# Altium PCB mini_system.PcbDoc
Units mil, origin at the board's own origin, x right, y up, seen from the top; angles counter-clockwise.
Board outline 2100 x 900 mil, 2 copper layers (Top Layer, Bottom Layer); 33 components, 50 nets, 179 pads, 47 vias.
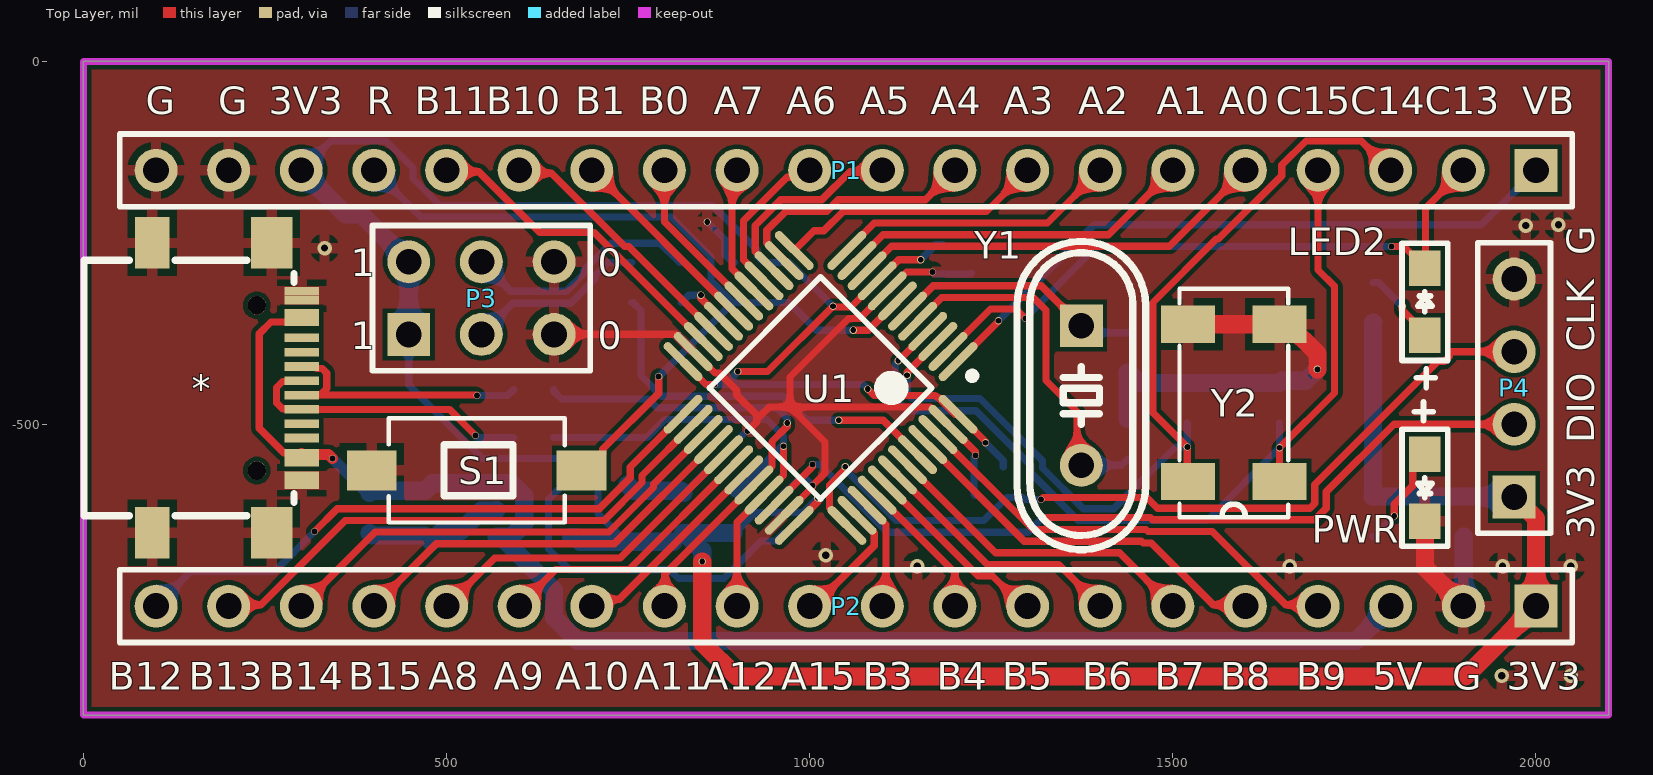
[diagram p0: Top Layer view]
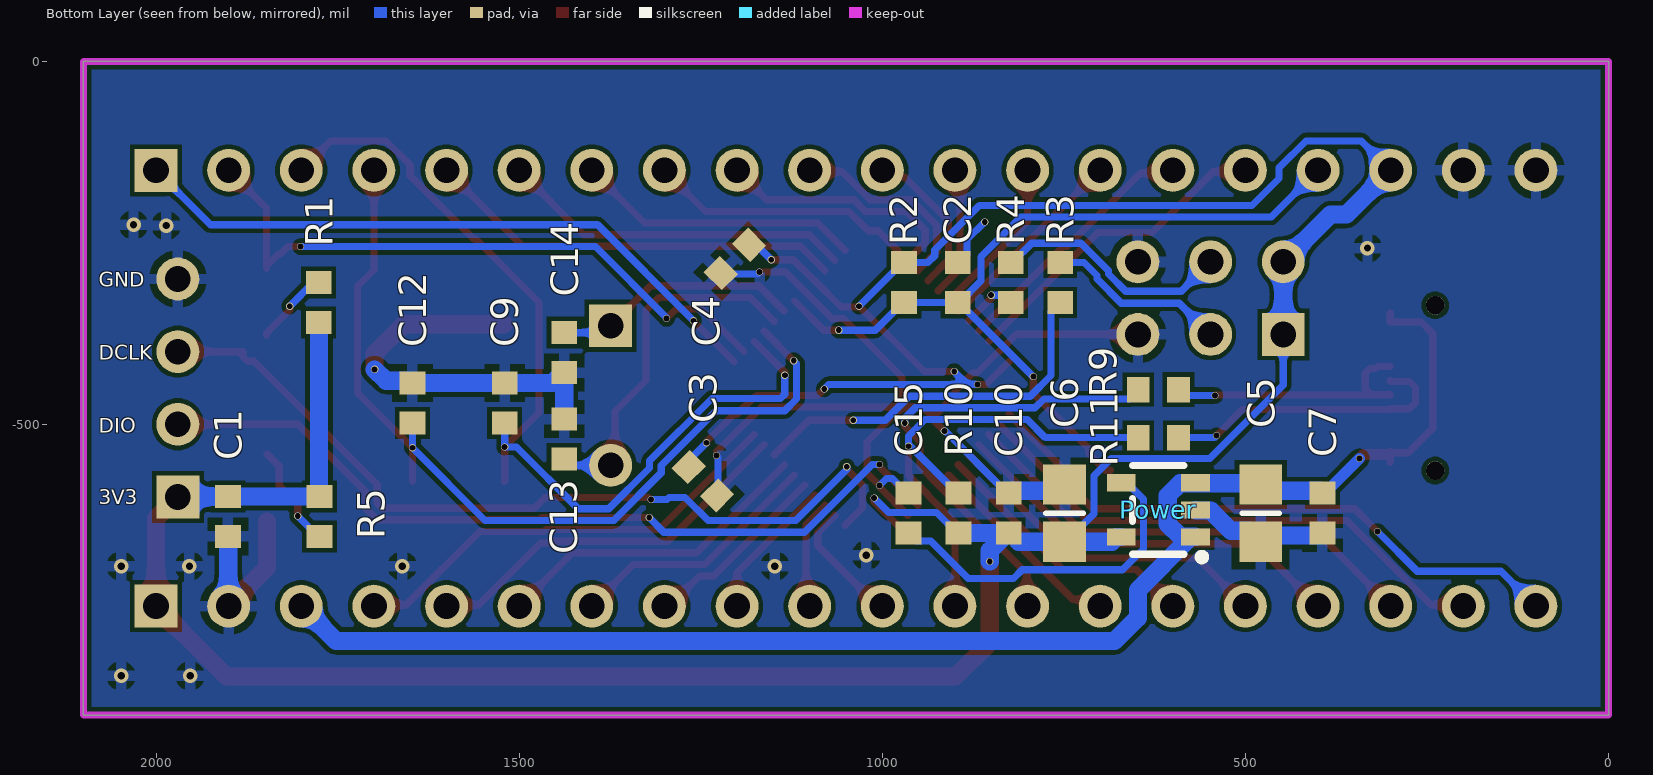
[diagram p1: Bottom Layer view, seen from below]

## Layer stack, top to bottom
Top Solder: solder mask 0.4, Solder Resist, Dk 3.5
Top Layer: signal copper 1.4
Dielectric 1: dielectric 12.6, FR-4, Dk 4.8
Bottom Layer: signal copper 1.4
Bottom Solder: solder mask 0.4, Solder Resist, Dk 3.5

## Board outline
0,-900 2100,-900 2100,0 0,0

## Design rules (kind name [scope] priority, off if disabled: settings)
Clearance [All] p1: gap=6 ignorepadtopadclearanceinfootprint=FALSE
HoleSize [All] p1: absolutevalues=TRUE maxlimit=100 minlimit=4 maxpercent=80.000 minpercent=20.000
HoleToHoleClearance [All] p1: gap=8 allowstackedmicrovias=TRUE
MinimumSolderMaskSliver [All] p1: minsoldermaskwidth=6
PlaneConnect [All] p1: planeconnectstyle=Relief reliefexpansion=20 reliefentries=4 reliefconductorwidth=15 reliefairgap=10
PolygonConnect [All] p1: connectstyle=Relief reliefconductorwidth=15 reliefentries=4 polygonreliefangle="90 Angle" airgapwidth=10
RoutingVias [All] p1: holewidth=10 width=20 viastyle="Through Hole" minholewidth=6 minwidth=12 maxholewidth=16 maxwidth=32
SilkToSilkClearance [All] p1: silktosilkclearance=1
SilkToSolderMaskClearance [IsPad] p1: minsilkscreentomaskgap=0 clearancetoexposedcopper=TRUE
SolderMaskExpansion [All] p1: expansion=4 istentingtop=TRUE
UnRoutedNet [All] p1: checkbadconnections=TRUE
Width Width_GND [InNet('GND')] p1: maxlimit=80 minlimit=10 preferedwidth=25 minimp=50.000000 maximp=50.000000 favimp=50.000000
Width Width_5V [InNet('+5')] p2: maxlimit=80 minlimit=10 preferedwidth=25 minimp=50.000000 maximp=50.000000 favimp=50.000000
Width Width_3V3 [InNet('3V3')] p3: maxlimit=80 minlimit=10 preferedwidth=25 minimp=50.000000 maximp=50.000000 favimp=50.000000
Width [All] p4: maxlimit=40 minlimit=8 preferedwidth=10 minimp=50.000000 maximp=50.000000 favimp=50.000000
23 further rules are at their usual default settings.

## Components (designator, comment, footprint, x,y, rotation, side; value= is the part's Value field where it differs from the comment)
* "USB-C 16P" "USB-C 16P" 95,-250 r270 top
C1 "104" 1608[0603] 1901,-626.44 r90 bottom value=100pF
C2 "104" 1608[0603] 896,-304.56 r270 bottom value=100pF
C3 "104" 1608[0603] 1247,-578 r45 bottom value=100pF
C4 "104" 1608[0603] 1203,-272 r135 bottom value=100pF
C5 "105" 6-0805_M 479,-622 r90 bottom value=100pF
C6 "105" 6-0805_M 749,-622 r270 bottom value=100pF
C7 "104" 1608[0603] 394,-622 r90 bottom value=100pF
C9 "Cap" 1608[0603] 1520,-470.44 r90 bottom value=100pF
C10 "104" 1608[0603] 826,-622 r270 bottom value=100pF
C12 "Cap" 1608[0603] 1647,-470.44 r270 bottom value=100pF
C13 "Cap" 1608[0603] 1438,-520 r90 bottom value=100pF
C14 "Cap" 1608[0603] 1438,-401 r90 bottom value=100pF
C15 "223" 1608[0603] 964,-622 r90 bottom value=100pF
LED2 "LED" LED 1847,-331 r270 top
P1 "Header 20" HDR1X20 2000,-150 r180 top locked
P2 "Header 20" HDR1X20 2000,-750 r180 top locked
P3 "Header 3X2" HDR2X3 448,-376 r0 top
P4 "Header 4" HDR1X4 1970,-599.61 r90 top
Power "ME6211" ME6211 620,-617.51 r180 bottom
PWR "LED" LED 1847,-587 r90 top
R1 "Res" 1608[0603] 1776,-332 r90 bottom
R2 "Res" 1608[0603] 970,-304.56 r90 bottom
R3 "104" 1608[0603] 755,-304.56 r90 bottom
R4 "104" 1608[0603] 823,-304.56 r270 bottom
R5 "Res" 1608[0603] 1775,-626.44 r270 bottom
R9 "22R" 1608[0603] 620,-452 r0 bottom
R10 "10K" 1608[0603] 895,-622 r90 bottom
R11 "22R" 1608[0603] 620,-518 r0 bottom
S1 "Button" BUTTON 397,-563 r0 top
U1 "STM32F103C8T6" STM-LQFP48_N 1015,-449.61 r225 top locked
Y1 "8M" XTAL3 1374,-364 r270 top
Y2 "XTAL_32.768" MC-306 1583.99,-470.27 r90 top

## Footprints (in the part's own frame and the unit in brackets; to place one, negate y for a bottom-side part, rotate by r counter-clockwise, add the part's x,y. Pads: shape width x height; smd on the part's side, far side on the other; paste and mask are expansions set on the pad)
6-0805_M [mm] "Chip Resistor, Body 2.0x1.2mm, IPC Low Density"
  rect 1.4x1.5 smd: 1(-1,0) 2(1,0)
  silkscreen extent 0,-0.65 0,0.65, body extent -1.07,-0.7 1.07,0.7, height 0.7
1608[0603] [mm] "Chip Capacitor, Body 1.6x0.8mm, IPC High Density"
  rect 0.8x0.9 smd: 1(-0.7,0) 2(0.7,0)
  body extent -0.87,-0.48 0.87,0.48, height 1.3
BUTTON [mm]
  rect 1.74x1.4 smd: 1(0,0) 2(7.34,0)
  silkscreen extent 0.59,-1.83 6.75,1.83
HDR1X4 [mm] "Connector; Header; 4 Position"
  rect 1.5x1.5 hole 0.9: 1(0,0)
  round 1.5 hole 0.9: 2(2.54,0) 3(5.08,0) 4(7.62,0)
  silkscreen extent -1.27,-1.27 8.89,1.27
HDR1X20 [mm] "Connector; Header; 20 Position"
  rect 1.5x1.5 hole 0.9: 1(0,0)
  round 1.5 hole 0.9: 2(2.54,0) 3(5.08,0) 4(7.62,0) 5(10.16,0) 6(12.7,0) 7(15.24,0) 8(17.78,0) 9(20.32,0) 10(22.86,0) 11(25.4,0) 12(27.94,0) 13(30.48,0) 14(33.02,0) 15(35.56,0) 16(38.1,0) 17(40.64,0) 18(43.18,0) 19(45.72,0) 20(48.26,0)
  silkscreen extent -1.27,-1.27 49.53,1.27
HDR2X3 [mm] "Connector; Header; 3x2 Position"
  rect 1.5x1.5 hole 0.9: 1(0,0)
  round 1.5 hole 0.9: 2(0,2.54) 3(2.54,0) 4(2.54,2.54) 5(5.08,0) 6(5.08,2.54)
  silkscreen extent -1.27,-1.27 6.35,3.81
LED [mil]
  rect 49x43 smd: 1(46.26,0) 2(-46.26,0)
  silkscreen extent -81,-31 118,31
MC-306 [mm]
  rect 1.3x1.9 smd: 1(-2.75,-1.6) 2(2.75,-1.6) 3(2.75,1.6) 4(-2.75,1.6)
  silkscreen extent -4,-1.9 4,1.9
ME6211 [mm] "SOT23-5"
  rect 1x0.6 smd: 1(1.3,-0.95) 2(1.3,0) 3(1.3,0.95) 4(-1.3,0.95) 5(-1.3,-0.95)
  silkscreen extent -0.9,-1.78 1.65,1.55
STM-LQFP48_N [mm] "QFP, 48-Leads, Body 7x7mm, Pitch 0.5mm, IPC Medium Density"
  oval 1.8x0.3 smd: 1(-4.05,2.75) 2(-4.05,2.25) 3(-4.05,1.75) 4(-4.05,1.25) 5(-4.05,0.75) 6(-4.05,0.25) 7(-4.05,-0.25) 8(-4.05,-0.75) 9(-4.05,-1.25) 10(-4.05,-1.75) 11(-4.05,-2.25) 12(-4.05,-2.75) 25(4.05,-2.75) 26(4.05,-2.25) 27(4.05,-1.75) 28(4.05,-1.25) 29(4.05,-0.75) 30(4.05,-0.25) 31(4.05,0.25) 32(4.05,0.75) 33(4.05,1.25) 34(4.05,1.75) 35(4.05,2.25) 36(4.05,2.75)
  oval 0.3x1.8 smd: 13(-2.75,-4.05) 14(-2.25,-4.05) 15(-1.75,-4.05) 16(-1.25,-4.05) 17(-0.75,-4.05) 18(-0.25,-4.05) 19(0.25,-4.05) 20(0.75,-4.05) 21(1.25,-4.05) 22(1.75,-4.05) 23(2.25,-4.05) 24(2.75,-4.05) 37(2.75,4.05) 38(2.25,4.05) 39(1.75,4.05) 40(1.25,4.05) 41(0.75,4.05) 42(0.25,4.05) 43(-0.25,4.05) 44(-0.75,4.05) 45(-1.25,4.05) 46(-1.75,4.05) 47(-2.25,4.05) 48(-2.75,4.05)
  silkscreen extent -4.17,-2.75 2.75,3.57, body extent -3.5,-3.5 3.5,3.5, height 1.6
"USB-C 16P" [mm]
  rect 1.8x1.45 smd: 0(0,4.18) 0(10.14,4.18)
  rect 1.8x1.2 smd: 0(0,0) 0(10.14,0)
  rect 0.3x1.2 smd: A1(1.999,5.22) A4(2.761,5.22) A5(3.82,5.22) A6(4.82,5.22) A7(5.32,5.22) A8(6.32,5.22) A9(7.361,5.22) A12(8.149,5.22) B1(8.454,5.22) B4(7.666,5.22) B5(6.82,5.22) B6(5.82,5.22) B7(4.32,5.22) B8(3.32,5.22) B9(2.456,5.22) B12(1.694,5.22)
  round 0.65 hole 0.65 unplated: ""(2.18,3.65) ""(7.96,3.65)
  silkscreen extent 0.6,-2.39 9.54,4.95
XTAL3 [mm]
  rect 1.5x1.5 hole 0.9: 1(0,0)
  round 1.5 hole 0.9: 2(4.88,0)
  silkscreen extent -2.95,-2.25 7.83,2.25

## Part data
C1 C2 C3 C4 C5 C6 C7 C10 C15: library part Cap, "Capacitor", LatestRevisionDate=17-Jul-2002, LatestRevisionNote="Re-released for DXP Platform.", PackageDescription="Radial Cap, Thru-Hole; 2 Leads; 0.3 in Pin Spacing", PackageReference=RAD-0.3, Published=8-Jun-2000, Publisher="Altium Limited"
C9 C12 C13 C14: "Capacitor", LatestRevisionDate=17-Jul-2002, LatestRevisionNote="Re-released for DXP Platform.", PackageDescription="Radial Cap, Thru-Hole; 2 Leads; 0.3 in Pin Spacing", PackageReference=RAD-0.3, Published=8-Jun-2000, Publisher="Altium Limited"
LED2 PWR: "Typical INFRARED GaAs LED", LatestRevisionDate=08-Jul-2005, LatestRevisionNote="Mech Layer 1 removed.", PackageDescription="LED; 2 Leads", PackageReference=LED-0, Published=8-Jun-2000, Publisher="Altium Limited"
P1 P2: "Header, 20-Pin", LatestRevisionDate=17-Jul-2002, LatestRevisionNote="Re-released for DXP Platform.", Publisher="Altium Limited"
P3: "Header, 3-Pin, Dual row", LatestRevisionDate=17-Jul-2002, LatestRevisionNote="Re-released for DXP Platform.", Publisher="Altium Limited"
P4: "Header, 4-Pin", LatestRevisionDate=17-Jul-2002, LatestRevisionNote="Re-released for DXP Platform.", Publisher="Altium Limited"
Power: "SOT23-5"
R1 R2 R5: "Resistor", LatestRevisionDate=17-Jul-2002, LatestRevisionNote="Re-released for DXP Platform.", PackageDescription="Axial Device, Thru-Hole; 2 Leads; 0.4 in Pin Spacing", PackageReference=AXIAL-0.4, Published=8-Jun-2000, Publisher="Altium Limited"
R3 R4 R9 R10 R11: library part Res, "Resistor", LatestRevisionDate=17-Jul-2002, LatestRevisionNote="Re-released for DXP Platform.", PackageDescription="Axial Device, Thru-Hole; 2 Leads; 0.4 in Pin Spacing", PackageReference=AXIAL-0.4, Published=8-Jun-2000, Publisher="Altium Limited"
S1: "Switch", LatestRevisionDate=17-Jul-2002, LatestRevisionNote="Re-released for DXP Platform.", PackageDescription="Switch; 2 Leads", PackageReference=SPST-2, Published=24-Mar-1999, Publisher="Altium Limited"
U1: "ARM Cortex-M3 32-bit MCU, 64 KB Flash, 20 KB Internal RAM, 37 I/Os, 48-pin LQFP, -40 to 85 degC, Tray", I/Os (High Current)=37, Operating Frequency(F) (Processor speed) (MHz)=72, Supplier Part Number 1=497-6063-ND, Supply Voltage(Vcc) min (V)=2, A/D Converter="2x12-bit (10 Channel)", ComponentLink1Description="Manufacturer URL", ComponentLink1URL=http://www.st.com/web/en/home.html, ComponentLink2Description=Datasheet, ComponentLink2URL=http://www.st.com/st-web-ui/static/active/en/resource/technical/document/datasheet/CD00161566.pdf, ComponentLink3Description="Package Specification", ComponentLink3URL=http://www.st.com/st-web-ui/static/active/en/resource/technical/document/datasheet/DM00058181.pdf, Core="ARM Cortex-M3", DatasheetVersion="Rev. 16", FLASH Size (Prog) (kB)=64, Internal RAM Size (kB)=20, Mounting Technology="Surface Mount", PackageDescription="48-Pin Low Profile Quad Flat Package, 7 x 7 mm Body, 0.5 mm Pitch", PackageReference=LQFP48, PackageVersion="Rev. 6, 06/2013", Packing=Tray, PartNumber=STM32F103C8T6, Supplier 1=Digi-Key, Supplier 2=Farnell, Supplier 3=Newark, Supplier 4=Newark, Supplier 5=Mouser, Supplier Part Number 2=1447637, Supplier Part Number 3=59M2182, Supplier Part Number 4=57P1222, Supplier Part Number 5=511-STM32F103C8T6
Y1: library part XTAL, "Crystal Oscillator", LatestRevisionDate=17-Jul-2002, LatestRevisionNote="Re-released for DXP Platform.", PackageDescription="Crystal, Thru-Hole; 2 Leads; Body 3.1 x 8.2 mm (Dia.xH)", PackageReference=R38, Published=8-Jun-2000, Publisher="Altium Limited"
Y2: "32.768kHz", LatestRevisionDate=17-Jul-2002, LatestRevisionNote="Re-released for DXP Platform.", PackageDescription="Crystal, Thru-Hole; 2 Leads; Body 3.1 x 8.2 mm (Dia.xH)", PackageReference=R38, Published=8-Jun-2000, Publisher="Altium Limited"

## Via types
v1: diameter 10, hole 8, Top Layer to Bottom Layer, tented both sides, 37 vias
v2: diameter 20, hole 10, Top Layer to Bottom Layer, tented both sides, 10 vias

## Nets (pads, with @x,y where several pads share a name; then routed paths per layer and width w, separated by ;. In a path a pad name is that pad's centre, name@x,y a point inside that pad or via, vN(x,y) a via of type N, cw(c..) or ccw(c..) an arc to the next point about the centre after c; other vN are vias at no path point)
3V3: C1.2 C3.2 C4.2 C6.2 C10.2 P1.18 P2.1 P3.1 P3.2 P4.1 Power.5 R1.1 R2.2 R5.1 R10.1 U1.9 U1.24 U1.36 U1.48 | length 4899.2
  Top Layer w10: U1.24 857.28,-445 v1(869,-445) ; v1(901,-427) 942,-427 v1(1032,-337) 1033.01,-338.01 1057,-338.01 U1.9 1093.44,-302.06 1122.5,-273 v1(1153,-273) ; U1.36 1011.25,-606.47 v1(1011.25,-601.25) ; v1(1080,-451) 1088.85,-459.85 1172.66,-459.85 1174.74,-461.93 1176.51,-461.93 1200.37,-485.8 U1.48 1242,-523.49 v1(1242,-525)
  Top Layer w25: v1@851.97,-693.03 851.97,-799.97 899,-847 1903,-847 P2.1 2000,-629.61 P4.1 ; v1@852,-693 v1(852,-688.5)
  Bottom Layer w10: P1.18 340.53,-109.47 416.79,-109.47 453.9,-146.58 453.9,-161.21 491.01,-198.32 866.34,-198.32 927.78,-259.76 927.78,-267.49 937.28,-277 R2.2 971.97,-277 v1(1032,-337) ; P3.1 448,-445.63 549.09,-546.72 684.84,-546.72 708.47,-570.35 708.47,-622.81 747.03,-661.37 C6.2 ; v1(869,-445) 883,-445 ; R10.1 896.97,-649.56 925.34,-621.19 991.32,-621.19 v1(1011.25,-601.25) ; v1(901,-427) 883,-445 ; v1(1080,-451) 1074,-445 883,-445 ; v1(1153,-273) 1173.49,-252.51 C4.2 ; v1(1242,-525) 1266.49,-549.49 C3.2
  Bottom Layer w25: P1.18 360.7,-210.7 382.7,-210.7 P3.2 P3.1 ; Power.5 677.68,-654.91 684.14,-661.37 C6.2@747.03,-661.37 ; C6.2 C10.2@812.22,-661.37 ; C10.2 C10.2@827.97,-649.56 ; v1(852,-688.5) 852,-673.59 C10.2@827.97,-649.56 ; R10.1 C10.2@827.97,-649.56 ; R1.1 1775.5,-360.06 1775.5,-598.38 R5.1 C1.2 1901.36,-599.24 1969.64,-599.24 P4.1
+5: *.A4 *.A9 *.B4 *.B9 C5.2 C7.2 P2.3 Power.1 Power.3 | length 2051.5
  Top Layer w10: *.B4 *.A9 299.61,-538.91 275.84,-538.91 242,-505.08 242,-375.01 258.3,-358.71 *.A4 *.B9
  Top Layer w15: *.A9 302.11,-541.41 337.61,-541.41 v1(342.89,-546.69)
  Bottom Layer w15: v1(342.89,-546.69) 390.64,-594.44 C7.2
  Bottom Layer w25: C7.2 397.25,-591.19 470.44,-591.19 C5.2 480.83,-580.8 589.77,-580.8 607,-598.04 607,-636.99 589.77,-654.22 569.51,-654.22 Power.1 575.32,-654.91 648.03,-727.62 648.03,-765.95 680.11,-798.03 1751.97,-798.03 P2.3
BOOT0: R3.1 U1.44 | length 532.8
  Top Layer w10: v1(1040,-494) 1101.15,-494 U1.44
  Bottom Layer w10: R3.1 756.97,-332.12 767.72,-342.87 767.72,-432.34 796.37,-461 962.88,-461 995.88,-494 v1(1040,-494)
BOOT1: R4.2 U1.20 | length 80.3
  Top Layer w10: v1(850.18,-321.82) 850.18,-326.05 881.37,-357.25 U1.20
  Bottom Layer w10: R4.2 833.3,-321.82 v1(850.18,-321.82)
D+: *.A6 *.B6 R11.1 | length 405.8
  Top Layer w10: *.A6 299.61,-440.67 274.21,-440.67 265.89,-448.99 265.89,-469.91 274.21,-478.23 299.61,-478.23 *.B6 504.13,-479.13 v1(540,-515)
  Bottom Layer w10: v1(540,-515) 543,-518 R11.1
D-: *.A7 *.B7 R9.1 | length 393.3
  Top Layer w10: *.B7 318.23,-420.08 321.01,-422.86 328.69,-422.86 335.13,-429.3 335.13,-450.23 326.82,-458.54 301.42,-458.54 *.A7 541.45,-459.45 v1(542,-460)
  Bottom Layer w10: v1(542,-460) 584.44,-460 R9.1
GND: *.0 *.A1 *.A12 *.B1 *.B12 C1.1 C2.1 C3.1 C4.1 C5.1 C6.1 C7.1 C9.2 C10.1 C12.1 C13.2 C14.1 C15.2 P1.19 P1.20 P2.2 P3.5 P3.6 P4.4 Power.2 PWR.2 S1.1 U1.8 U1.23 U1.35 U1.47 Y2.2 Y2.3 | length 2610.9
  Top Layer w10: P3.5 648.37,-375.63 815.26,-375.63 839.13,-399.5 U1.23 840.11,-399.5 869.61,-429 875.63,-429 899.69,-453.06 899.69,-459.57 927,-486.88 927,-496.55 v1(914.55,-509) ; 930.06,-489.94 944.15,-475.85 972.85,-475.85 ; U1.35 1004,-585.88 v1(1004,-584) 1021,-567 1021,-524 972.85,-475.85 ; v1(1169,-290) 1133.34,-290 1107.36,-315.98 U1.8 1068.84,-354.01 1053.37,-354.01 972.85,-434.53 972.85,-475.85 ; v1(1228.23,-542.77) 1228.23,-537.56 U1.47 1189.89,-499.72 1166.03,-475.85 972.85,-475.85
  Top Layer w25: Y2.3 Y2.2 1658.8,-362 1699,-402.2 v1(1699,-424) ; PWR.2 1847,-697 P2.2
  Bottom Layer w10: C10.1 827.97,-594.44 913.41,-509 v1(914.55,-509) ; v1(859,-221) 883.28,-245.28 883.28,-266.25 894.03,-277 C2.1 ; C15.2 965.97,-594.44 986.06,-574.35 994.35,-574.35 v1(1004,-584) ; v1(1169,-290) 1171.88,-292.88 1221.1,-292.88 C4.1 ; C3.1 1226.12,-596.1 1226.12,-544.88 v1(1228.23,-542.77)
  Bottom Layer w25: C7.1 397.25,-652.81 470.44,-652.81 C5.1 494.06,-646.31 519.76,-646.31 547.87,-618.2 568.13,-618.2 Power.2 ; C6.1 757.56,-591.19 822.75,-591.19 C10.1 ; C13.2 C14.1 1439.97,-428.56 1454.29,-442.88 C9.2 C12.1 1650.25,-439.63 1683.37,-439.63 v1(1699,-424) ; P2.2 1900.5,-749.5 1900.5,-654.5 C1.1
  other v2: 1953,-846 2048,-846 1148,-695 1661,-695 1954,-695 2048,-695 1022,-680 332,-257 1986,-226 2031,-225
NetC15_1: C15.1 Power.4 | length 474.7
  Bottom Layer w10: Power.4 663.31,-580.11 640.5,-602.91 640.5,-671.27 669.15,-699.93 807.24,-699.93 819.31,-712 881.58,-712 933.27,-660.31 953.25,-660.31 C15.1
NetLED2_1: LED2.1 R1.2 | length 107
  Top Layer w10: v1(1816,-337) 1816,-342.26 1848,-374.26 LED2.1@1848,-377.26
  Bottom Layer w10: R1.2 1783.44,-304.44 v1(1816,-337)
NetP3_3: P3.3 R3.2 | length 250.7
  Bottom Layer w10: P3.3 590.99,-333.01 670.93,-333.01 704.53,-299.41 704.53,-294.76 722.28,-277 R3.2
NetP3_4: P3.4 R4.1 | length 333
  Bottom Layer w10: P3.4 588.53,-316.53 664.79,-316.53 688.53,-292.79 688.53,-288.13 726.4,-250.25 794.28,-250.25 821.03,-277 R4.1
NetPWR_1: PWR.1 R5.2 | length 144.2
  Top Layer w10: v1(1804.97,-626) 1804.97,-609.9 1830.5,-584.37 1830.5,-557.24 PWR.1
  Bottom Layer w10: R5.2 1776.97,-654 v1(1804.97,-626)
NRST: C2.2 P1.17 R2.1 S1.2 U1.7 | length 1169
  Top Layer w10: S1.2 692.67,-563 715.23,-540.44 715.23,-533.75 792,-456.98 v1(792,-434) ; v1(1060,-370.01) 1080.68,-370.01 U1.7
  Bottom Layer w10: P1.17 464.32,-214.32 809.34,-214.32 864.28,-269.26 864.28,-302.36 C2.2@894.03,-332.12 ; v1(792,-434) 792.15,-434 C2.2@894.03,-332.12 ; v1(1060,-370.01) 1009.86,-370.01 971.97,-332.12 R2.1 C2.2@894.03,-332.12
OSC_IN: C13.1 U1.5 Y1.2 | length 498.7
  Top Layer w10: U1.5 1149.12,-357.74 1181.85,-325 1307.63,-325 1325.33,-342.7 1325.33,-439.33 1368.15,-482.15 1368.15,-550.28 Y1.2
  Bottom Layer w10: Y1.2 1429.43,-556.13 C13.1
OSC_OUT: C14.2 U1.6 Y1.1 | length 344.4
  Top Layer w10: U1.6 1135.2,-343.82 1170.02,-309 1319,-309 Y1.1
  Bottom Layer w10: Y1.1 1383.44,-373.44 C14.2
PA0: P1.5 U1.10 | length 578.2
  Top Layer w10: U1.10 1112.64,-254.53 1495.47,-254.53 P1.5
PA1: P1.6 U1.11 | length 486.3
  Top Layer w10: U1.11 1100.8,-238.53 1411.47,-238.53 P1.6
PA2: P1.7 U1.12 | length 394.5
  Top Layer w10: U1.12 1088.97,-222.53 1327.47,-222.53 P1.7
PA3: P1.8 U1.13 | length 366.9
  Top Layer w10: U1.13 979.4,-259.71 1005.99,-233.12 1019.45,-233.12 1046.04,-206.53 1243.47,-206.53 P1.8
PA4: P1.9 U1.14 | length 344.8
  Top Layer w10: U1.14 964.89,-273.73 941.02,-249.87 941.02,-232.42 966.92,-206.53 1023.41,-206.53 1039.41,-190.53 1159.47,-190.53 P1.9
PA5: P1.10 U1.15 | length 279.5
  Top Layer w10: U1.15 950.97,-287.65 925.02,-261.7 925.02,-225.79 960.29,-190.53 1016.79,-190.53 1055.47,-151.84 1098.16,-151.84 P1.10
PA6: P1.11 U1.16 | length 214.1
  Top Layer w10: U1.16 937.05,-301.57 909.02,-273.54 909.02,-219.17 968.8,-159.39 990.61,-159.39 P1.11
PA7: P1.12 U1.17 | length 181.3
  Top Layer w10: P1.12 893.02,-156.98 893.02,-285.38 923.13,-315.49 U1.17
PA8: P2.16 U1.29 | length 467.7
  Top Layer w10: P2.16 566.38,-683.62 739.23,-683.62 U1.29
PA9: P2.15 U1.30 | length 375.9
  Top Layer w10: P2.15 650.38,-699.62 751.07,-699.62 U1.30
PA10: P2.14 U1.31 | length 284.1
  Top Layer w10: P2.14 709.39,-740.61 737.91,-740.61 U1.31
PA11: P2.13 R9.2 U1.32 | length 667.5
  Top Layer w10: P2.13 800.89,-749.11 800.89,-705.47 U1.32 923.13,-582.74 948,-557.87 948,-523.37 969,-502.37 v1(969,-498)
  Bottom Layer w10: R9.2 647.56,-453.97 658.31,-464.72 777.46,-464.72 789.75,-477 954.64,-477 969,-491.36 v1(969,-498)
PA12: P2.12 R10.2 R11.2 U1.33 | length 692.7
  Top Layer w10: P2.12 900,-634.69 937.05,-597.64 937.05,-596.66 964,-569.71 v1(964,-530)
  Bottom Layer w10: R11.2 775.47,-518 800.47,-493 941.37,-493 964,-515.63 v1(964,-530) 961.41,-530 896.97,-594.44 R10.2
PA15: P2.11 U1.38 | length 175.1
  Top Layer w10: P2.11 1005.77,-750 1088.98,-666.79 1088.98,-649.35 1065.11,-625.48 U1.38
PB0: P1.13 U1.18 | length 225.1
  Top Layer w10: P1.13 800,-220.69 U1.18
PB1: P1.14 U1.19 | length 275.6
  Top Layer w10: P1.14 700.98,-150 894.8,-343.82 U1.19
PB3: P2.10 U1.39 | length 151.7
  Top Layer w10: U1.39 1079.03,-611.56 1104.98,-637.51 1104.98,-745.02 P2.10
PB4: P2.9 U1.40 | length 197.2
  Top Layer w10: U1.40 1200,-704.2 P2.9
PB5: P2.8 U1.41 | length 262.2
  Top Layer w10: U1.41 1232.18,-708.54 1251.8,-708.54 1293.26,-750 P2.8
PB6: P2.7 U1.42 | length 354.1
  Top Layer w10: U1.42 1244.02,-692.54 1342.54,-692.54 P2.7
PB7: P2.6 U1.43 | length 445.9
  Top Layer w10: U1.43 1255.86,-676.54 1426.54,-676.54 P2.6
PB8: P2.5 U1.45 | length 529.6
  Top Layer w10: U1.45 1295.53,-660.54 1456.58,-660.54 1459.16,-663.13 1470.44,-663.13 1555.47,-748.16 1598.16,-748.16 P2.5
PB9: P2.4 U1.46 | length 621.4
  Top Layer w10: U1.46 1300.57,-637.74 1307.37,-644.54 1463.2,-644.54 1465.79,-647.13 1483.87,-647.13 1554.44,-647.13 1655.47,-748.16 1698.16,-748.16 P2.4
PB10: P1.15 U1.21 | length 359.3
  Top Layer w10: P1.15 603.94,-153.94 644.53,-153.94 745.49,-254.91 750.71,-254.91 U1.21
PB11: P1.16 U1.22 | length 451.1
  Top Layer w10: P1.16 501.84,-151.84 544.53,-151.84 628.16,-235.47 703.43,-235.47 U1.22
PB12: P2.20 U1.25 | length 843.8
  Top Layer w10: v1(318.17,-647.35) 349.52,-616 710.34,-616 753.05,-573.29 753.05,-558.44 U1.25
  Bottom Layer w10: P2.20 148,-702 263.52,-702 v1(318.17,-647.35)
PB13: P2.19 U1.26 | length 748.9
  Top Layer w10: P2.19 201.84,-748.16 244.53,-748.16 360.69,-632 716.97,-632 769.05,-579.92 769.05,-570.28 U1.26
PB14: P2.18 U1.27 | length 654
  Top Layer w10: P2.18 402,-648 723.6,-648 785.05,-586.55 785.05,-582.12 U1.27
PB15: P2.17 U1.28 | length 559.6
  Top Layer w10: P2.17 486,-664 731.01,-664 U1.28
PC13: LED2.2 P1.2 U1.2 | length 896.2
  Top Layer w10: U1.2 1248.88,-341 1284,-341 v1(1297,-354) ; v1(1801,-255) 1818.26,-255 1828.5,-265.24 1831.5,-265.24 LED2.2@1848,-281.74 ; LED2.2@1848,-284.74 LED2.2@1848,-281.74 ; P1.2 1848,-202 LED2.2@1848,-281.74
  Bottom Layer w10: v1(1297,-354) 1297,-353 1395,-255 v1(1801,-255)
PC14: C9.1 P1.3 U1.3 Y2.4 | length 1327
  Top Layer w10: v1(1134.18,-432.16) 1134.18,-427.86 U1.3 ; Y2.4 1520,-577.54 v1(1520,-531) 1472.6,-483.6 1472.6,-331.85 1559.87,-244.58 1562.73,-244.58 1650,-157.31 1650,-142.69 1683.21,-109.47 1759.47,-109.47 P1.3
  Bottom Layer w10: v1(1134.18,-432.16) 1134.18,-458.14 1140.04,-464 1234.63,-464 1320.45,-549.83 1320.45,-559.89 1376.56,-616 1418.58,-616 1503.58,-531 v1(1520,-531) C9.1
PC15: C12.2 P1.4 U1.4 Y2.1 | length 1260.1
  Top Layer w10: v1(1122,-412) 1122.2,-412 U1.4 ; Y2.1 v1(1647,-532) 1722.5,-456.5 1722.5,-309.75 1700,-287.25 P1.4
  Bottom Layer w10: v1(1122,-412) 1118.18,-415.82 1118.18,-464.77 1134.42,-481 1229,-481 1304.45,-556.45 1304.45,-566.52 1369.93,-632 1547,-632 v1(1647,-532) C12.2
SWCLK: P4.3 U1.37 | length 1184.2
  Top Layer w10: v1(1049,-558) 1049,-561.63 1027.33,-583.3 1027.33,-614.55 1051.19,-638.42 U1.37 ; v1(1318.65,-603.35) 1321.7,-600.3 1464.22,-600.3 1479.04,-615.13 1497.13,-615.13 1688.94,-615.13 1695.39,-608.68 1695.39,-582.61 1865.24,-412.76 1874.06,-412.76 1880.5,-406.32 1880.5,-399.61 P4.3
  Bottom Layer w10: v1(1049,-558) 1049,-562 1119.15,-632.15 1239.85,-632.15 1271.7,-600.3 1293.65,-600.3 1296.7,-603.35 v1(1318.65,-603.35)
SWDIO: P4.2 U1.34 | length 1160
  Top Layer w10: U1.34 1004,-558.04 v1(1004,-555) ; v1(1321,-628) 1469.29,-628 1472.41,-631.13 1490.5,-631.13 1695.57,-631.13 1711.39,-615.31 1711.39,-592.68 1804.46,-499.61 P4.2
  Bottom Layer w10: v1(1004,-555) 1014,-555 1107.15,-648.15 1300.85,-648.15 v1(1321,-628)
VBAT: P1.1 U1.1 | length 905.2
  Top Layer w10: U1.1 1260,-357.72 v1(1260,-357)
  Bottom Layer w10: v1(1260,-357) 1392,-225 1925,-225 P1.1
pads on no net: *. *.A5 *.A8 *.B5 *.B8

## Polygon pours and split planes (outlines as drawn)
GND on Top Layer "GND_L01_P000" (solid, remove dead copper, pour order 0): 0,-900 2100,-900 2100,0 0,0
GND on Bottom Layer "GND_L02_P001" (solid, remove dead copper, pour order 1): 0,-900 2100,-900 2100,0 0,0

## Keep-outs
Keep-Out Layer:
  lines w10: 0,-900 0,-850 0,-450 0,0 ; 1,-900 2099,-900 ; 1,0 2099,0 ; 2100,-900 2100,0

## Silkscreen, mask and mechanical layers (free items; w line width, h text height)
Top Overlay:
  text "G" at 86,-73 h38
  text "G" at 186,-73 h38
  text "3V3" at 255,-73 h38
  text "R" at 390,-73 h38
  text "B11" at 456,-73 h38
  text "B10" at 555,-73 h38
  text "B1" at 677,-73 h38
  text "B0" at 765,-73 h38
  text "A7" at 868,-73 h38
  text "A6" at 968,-73 h38
  text "A5" at 1069,-73 h38
  text "A4" at 1167,-73 h38
  text "A3" at 1266.43,-73 h38
  text "A2" at 1370,-73 h38
  text "A1" at 1478,-73 h38
  text "A0" at 1564,-73 h38
  text "C15C14C13" at 1642,-73 h38
  text "VB" at 1981,-73 h38
  text "G" at 2080,-267 h38 r90
  text "CLK" at 2080,-399.44 h38 r90
  text "DIO" at 2080,-525.56 h38 r90
  text "3V3" at 2080,-658 h38 r90
  text "B12" at 35,-865 h38
  text "B13" at 145,-865 h38
  text "B14" at 255,-865 h38
  text "B15" at 365,-865 h38
  text "A8" at 475,-865 h38
  text "A9" at 565,-865 h38
  text "A10" at 650,-865 h38
  text "A11" at 758,-865 h38
  text "A12" at 853,-865 h38
  text "A15" at 961,-865 h38
  text "B3" at 1073,-865 h38
  text "B4" at 1175,-865 h38
  text "B5" at 1265,-865 h38
  text "B6" at 1375,-865 h38
  text "B7" at 1475,-865 h38
  text "B8" at 1565,-865 h38
  text "B9" at 1670,-865 h38
  text "5V" at 1775,-865 h38
  text "G" at 1885,-865 h38
  text "3V3" at 1960,-865 h38
Bottom Overlay:
  text "GND" at 2079,-310 h20
  text "DCLK" at 2079,-411 h20
  text "DIO" at 2079,-511 h20
  text "3V3" at 2079,-610 h20
Mechanical 1:
  the board outline again, w10

## Text inside footprints (layer, text, board x,y; h text height)
P3: Top Overlay "1" at 368,-396 h38; Top Overlay "1" at 368,-296 h38; Top Overlay "0" at 708,-396 h38; Top Overlay "0" at 708,-296 h38